# Altium PCB usb_to_i2c.PcbDoc
Units mm, origin at the board's own origin, x right, y up, seen from the top; angles counter-clockwise.
Board outline 38.77 x 21.02 mm, 2 copper layers (Top Layer, Bottom Layer), stack 0.325 mm thick; 16 components, 11 nets, 69 pads, 17 vias.
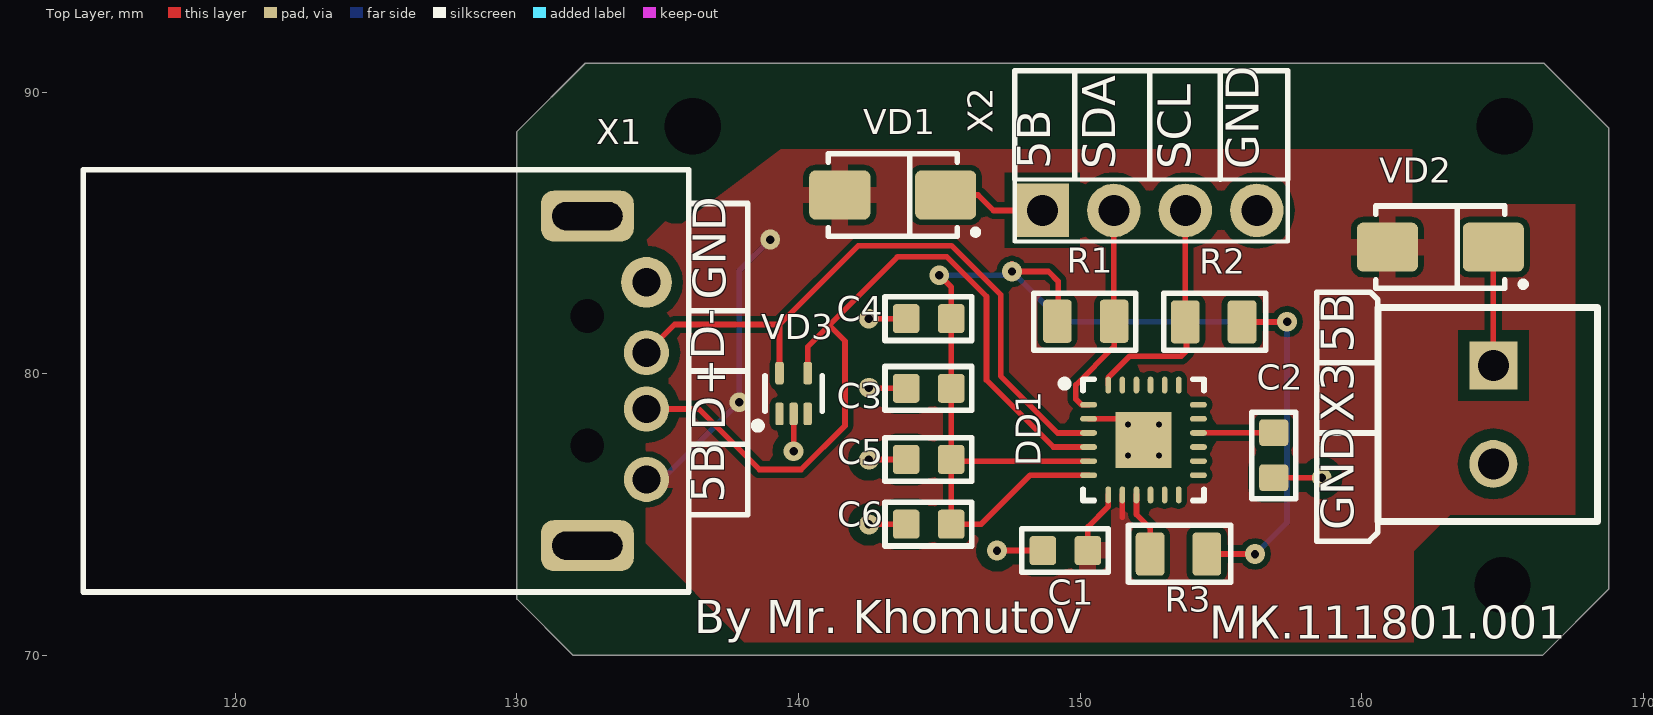
[diagram p0: Top Layer view]
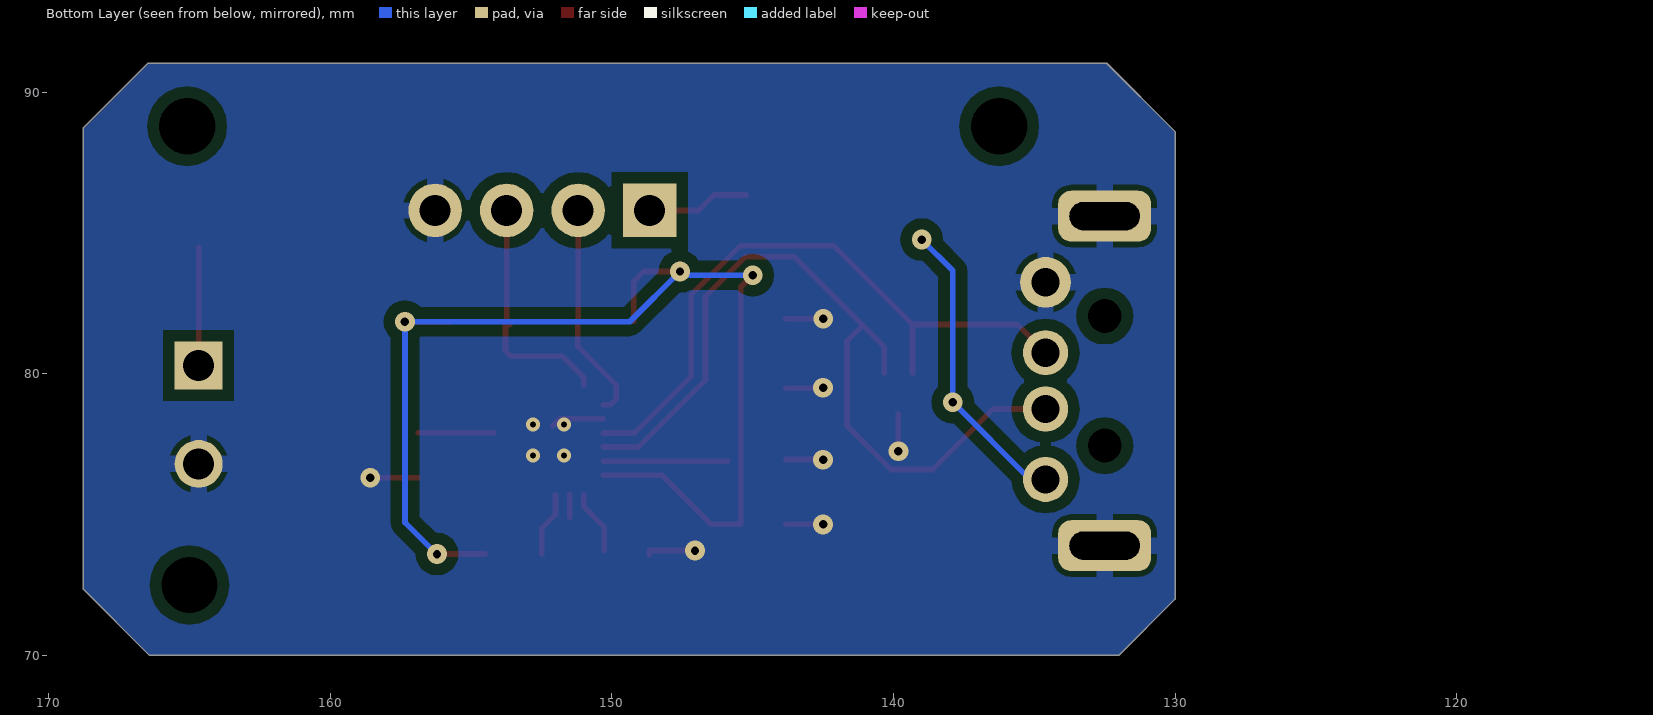
[diagram p1: Bottom Layer view, seen from below]

## Layer stack, top to bottom
Top Solder: solder mask 0.0102, Solder Resist, Dk 3.5
Top Layer: signal copper 0.0356
Dielectric 1: core 0.254, FR-4, Dk 4.2
Bottom Layer: signal copper 0.0356
Bottom Solder: solder mask 0.0102, Solder Resist, Dk 3.5

## Board outline
130,72 132,70 166.415,70 168.772,72.357 168.772,88.728 166.475,91.025 132.425,91.025 130,88.6

## Design rules (kind name [scope] priority, off if disabled: settings)
Clearance Clearance_power [InNet('+5В_USB') vs InNet('GND')] p1: gap=0.4 ignorepadtopadclearanceinfootprint=FALSE
Clearance Clearance_power_1 [InNet('X2_VCC') vs InNet('GND')] p2: gap=0.4 ignorepadtopadclearanceinfootprint=FALSE
Clearance Clearance_power_VDD [InNet('NetVD2_1') vs InNet('GND')] p3: gap=0.4 ignorepadtopadclearanceinfootprint=FALSE
Clearance Clearance_power3.3 [InNet('+3,3В') vs InNet('GND')] p4: gap=0.4 ignorepadtopadclearanceinfootprint=FALSE
Clearance [All] p5: gap=0.2 ignorepadtopadclearanceinfootprint=FALSE except(0.4: THPad-THPad THPad-Fill THPad-Poly THPad-Region; 0.6: Arc-THPad Track-THPad)
ComponentClearance [All] p1: gap=0.3 collisioncheckmode=3 verticalgap=0.01 showdistances=FALSE
MinimumSolderMaskSliver [All] p1: minsoldermaskwidth=0.05
PolygonConnect PolygonConnect_via [IsVia] p1: connectstyle=Direct reliefconductorwidth=0.254 reliefentries=4 polygonreliefangle="90 Angle" airgapwidth=0.254
PolygonConnect [All] p2: connectstyle=Relief reliefconductorwidth=0.6 reliefentries=4 polygonreliefangle="90 Angle" airgapwidth=0.2
RoutingVias [All] p1: holewidth=0.3 width=0.7 viastyle="Through Hole" minholewidth=0.3 minwidth=0.7 maxholewidth=0.3 maxwidth=0.7
SilkToSolderMaskClearance [IsPad] p1: minsilkscreentomaskgap=0 clearancetoexposedcopper=TRUE
SolderMaskExpansion [All] p1: expansion=0.102
Width [All] p1: maxlimit=3 minlimit=0.2 preferedwidth=0.2 minimp=50.000000 maximp=50.000000 favimp=50.000000
27 further rules are at their usual default settings.

## Components (designator, comment, footprint, x,y, rotation, side; value= is the part's Value field where it differs from the comment)
C1 "Capacitor" C0603 149.473,73.725 r0 top value=1мк
C2 "Capacitor" C0603 156.875,77.11 r90 top value=1мк
C3 "Capacitor" C0603 144.622,79.484 r0 top value=1мк
C4 "Capacitor" C0603 144.622,81.959 r0 top value=0,1мк
C5 "Capacitor" C0603 144.622,76.959 r0 top value=1мк
C6 "Capacitor" C0603 144.622,74.659 r0 top value=0,1мк
DD1 "CP2112-F02-GM" QFN24 152.25,77.65 r0 top
R1 "Resistor_0,125Вт" R0805 150.2,81.866 r180 top value=10к
R2 "Resistor_0,125Вт" R0805 154.743,81.841 r0 top value=10к
R3 "Resistor_0,125Вт" R0805 153.492,73.6 r0 top value=10к
VD1 "DiodeSchottky" SMA 143.345,86.35 r180 top
VD2 "DiodeSchottky" SMA 162.792,84.5 r180 top
VD3 "SP3003-02XTG" SOT553 139.825,79.3 r90 top
X1 "USB connector" "USB 2.0 A PLUG" 134.601,79.75 r90 top
X2 "Header_4_sct" PLS-4HOLES 156.275,85.8 r90 top
X3 "Выход питания" "TERMINAL 2 way-3.5mm" 164.272,78.55 r270 top

## Footprints (in the part's own frame and the unit in brackets; to place one, negate y for a bottom-side part, rotate by r counter-clockwise, add the part's x,y. Pads: shape width x height; smd on the part's side, far side on the other; paste and mask are expansions set on the pad)
C0603 [mm]
  rrect25% 0.94x1.03 smd: 1(-0.8,0) 2(0.8,0)
  silkscreen extent -1.55,-0.77 1.53,0.77, body extent -0.8,-0.4 0.8,0.4, height 0.9
PLS-4HOLES [mm]
  rect 1.9x1.9 hole 1.1: 1(0,7.62)
  round 1.9 hole 1.1: 2(0,5.08) 3(0,2.54)
  round 1.9 hole 1.1 mask+0.102: 4(0,0)
  silkscreen extent -1.1,-1.1 1.1,8.6
QFN24 [mm]
  oval 0.6x0.2 smd: 1(-1.95,1.25) 2(-1.95,0.75) 3(-1.95,0.25) 4(-1.95,-0.25) 5(-1.95,-0.75) 6(-1.95,-1.25) 13(1.95,-1.25) 14(1.95,-0.75) 15(1.95,-0.25) 16(1.95,0.25) 17(1.95,0.75) 18(1.95,1.25)
  oval 0.2x0.6 smd: 7(-1.25,-1.95) 8(-0.75,-1.95) 9(-0.25,-1.95) 10(0.25,-1.95) 11(0.75,-1.95) 12(1.25,-1.95) 19(1.25,1.95) 20(0.75,1.95) 21(0.25,1.95) 22(-0.25,1.95) 23(-0.75,1.95) 24(-1.25,1.95)
  rect 2x2 smd: 25(0,0)
  silkscreen extent -2.92,-2.15 2.15,2.15, body extent -2,-2 2,2, height 0.8
R0805 [mm] "Chip Resistor, 2-Leads, Body 2,10x1,30mm, IPC Medium Density"
  rrect25% 1.02x1.53 smd paste-5: 1(-1.008,0) 2(1.008,0)
  silkscreen extent -1.78,-1 1.85,1.02, body extent -1.1,-0.7 1.1,0.7, height 0.55
SMA [mm]
  rrect25% 2.17x1.74 smd: 1(-1.88,0) 2(1.88,0)
  silkscreen extent -3.04,-1.46 2.29,1.46, body extent -2.5,-1.35 2.5,1.35, height 2.15
SOT553 [mm]
  rrect50% 0.8x0.3 smd: 1(-0.725,0.5) 2(-0.725,0) 3(-0.725,-0.5)
  rrect50% 0.8x0.305 smd: 4(0.725,-0.5) 5(0.725,0.5)
  silkscreen extent -1.27,-1.02 0.64,1.39, body extent -0.65,-0.85 0.65,0.85, height 0.6
"TERMINAL 2 way-3.5mm" [mm]
  rect 1.7x1.7 hole 1.1: 1(-1.75,0.4)
  round 1.7 hole 1.1: 2(1.75,0.4)
  silkscreen extent -3.8,-3.7 3.8,4.1, body extent -3.56,-3.44 3.56,3.85, height 8.51
"USB 2.0 A PLUG" [mm]
  round 1.6 hole 1: 1(-3.5,0) 2(-1,0) 3(1,0)
  rrect50% 1.8x3.3 hole 1 slot 2.5 at 90 deg: 4(-5.85,2.1) 4(5.85,2.1)
  round 1.8 hole 1: 4(3.5,0)
  round 0 hole 1.2 unplated: ""(-2.3,2.1) ""(2.3,2.1)
  silkscreen extent -7.5,-1.5 7.5,20, body extent -6.3,0 6.3,20, height 4.15

## Part data
C1 C2 C3 C5: library part cap134, "Конденсатор", Part Name=Capacitors, Part Number=GRM188R71C105KA12D**, Voltage=50B, id=cap134, TKE=X7R
C4 C6: library part cap131, "Конденсатор", Part Name=Capacitors, Part Number=GRM188R71H104K, Voltage=50B, id=cap131, TKE=X7R
DD1: library part interf14, "USB-I2C преобразователь", Current Consumption=15mA, Manufacture="Silicon Laboratories", Part Name="HID USB to SMBUS Bridge", Power Supply=3.0-3.6V, id=interf14, Part Number=CP2112-F02-GM, Type Supply="Single Polar", Vref output=3.45V
R1 R2 R3: library part res97, "Резистор", Manufacture=Yageo, Part Name=Resistor, Part Number=RC0805FR-0710KL, Power=0,125Вт, Accuracy=1%, id=res97
VD1 VD2: library part diode2, "Диод Шоттки", Forward Current=3A, Forward Voltage=0,55B, Manufacture="Taiwan Semiconductor", Part Name="Diode Schottky", Part Number=SK34A, Reverse Voltage=40B, id=diode2
VD3: library part diode14, "Двухканальная ESD защита USB", Breakdown Voltage=6В, Capacitance=0,65pF, Leakage current=0,5uA, Manufacture=Littelfuse, Part Name="ESD Suppression Diodes for USB", id=diode14, Number of Channels=2, Part Number=SP3003-02XTG, Reverse Voltage=6В
X1: library part connect36, "Разъем - 4 конт. вилка", Manufacture=CUI, Part Name="USB 2.0 type A plug 4 pin Horizontal TH", Part Number=UP2-AH-1-TH, Contact_1=VBUS, Contact_2=D-, Contact_3=D+, Contact_4=GND, id=connect36
X2: library part connect10, "Разъем - 4 конт. розетка", Part Name="I2C устройства", Contact_1=5В, Contact_2=SDA, Contact_3=SCL, Contact_4=GND, id=connect10
X3: library part connect34, "Разъем - 2 конт. клеммник", Part Name="TERMINAL BLOCK 2 way", Contact_1=5В, Contact_2=GND, Etch=3.5mm, id=connect34

## Free pads (board coordinates)
  round 0 hole 2 unplated: 2(165.082,88.79) 3(165,72.5) 4(136.25,88.79)

## Via types
v1: diameter 0.7, hole 0.3, Top Layer to Bottom Layer, tented both sides, 13 vias
v2: diameter 0.5, hole 0.2, Top Layer to Bottom Layer, 4 vias

## Nets (pads, with @x,y where several pads share a name; then routed paths per layer and width w, separated by ;. In a path a pad name is that pad's centre, name@x,y a point inside that pad or via, vN(x,y) a via of type N, cw(c..) or ccw(c..) an arc to the next point about the centre after c; other vN are vias at no path point)
+3,3В: C3.2 C4.2 C5.2 C6.2 DD1.5 DD1.6 R1.2 R2.2 R3.2 | length 47.7
  Top Layer w0.2: v1(145,83.5) 145.422,83.078 C4.2 C3.2 C5.2 C6.2@145.422,74.704 ; C6.2 146.484,74.659 148.225,76.4 DD1.6 ; C5.2@145.885,76.9 147.05,76.9 DD1.5 ; v1@147.581,83.9 v1(147.581,83.632) 148.873,83.632 149.219,83.287 R1.2@149.219,81.866 ; R3.2 v1(156.21,73.6) ; R2.2 157.268,81.841 v1@157.347,81.762
  Bottom Layer w0.2: v1(145,83.5) 147.452,83.5 147.45,83.502 v1(147.581,83.632) 149.363,81.85 v1(157.347,81.85) 157.347,74.722 v1@156.225,73.6
+5В_USB: C1.2 DD1.7 DD1.8 VD1.2 VD2.2 X1.1 | length 13.7
  Top Layer w0.2: C1.2 150.273,74.562 151,75.289 DD1.7 ; 151.5,74.9 DD1.8
  Bottom Layer w0.2: X1.1 135.155,76.25 v1(137.894,78.989) 137.894,83.66 v1(139,84.766)
DD1_1_SDA: DD1.1 R1.1 X2.2 | length 7.8
  Top Layer w0.2: DD1.1 150.047,78.9 149.85,79.097 149.85,79.608 151.208,80.965 R1.1 ; R1.1@151.234,81.866 151.195,81.905 151.195,85.762 X2.2@151.234,85.8
DD1_3_D+: DD1.3 VD3.5 X1.3 | length 23.4
  Top Layer w0.2: X1.3 135.601,81.75 139.325,81.75 ; VD3.5 139.325,81.75 ; DD1.3 149.2,77.9 147.176,79.924 147.176,82.809 145.435,84.55 142.125,84.55 139.325,81.75
DD1_4_D-: DD1.4 VD3.4 X1.2 | length 29.1
  Top Layer w0.2: X1.2 136.462,78.75 138.612,76.6 140.094,76.6 141.65,78.156 141.65,81.162 141.113,81.698 ; VD3.4 140.325,80.958 143.517,84.15 145.269,84.15 146.675,82.744 146.675,79.773 149.048,77.4 DD1.4
DD1_9_R\S\T\: DD1.9 R3.1 | length 2.3
  Top Layer w0.2: DD1.9 152,75.006 152.485,74.521 R3.1
DD1_16_VPP: C2.2 DD1.16 | length 2.7
  Top Layer w0.2: DD1.16 C2.2
DD1_24_SCL: DD1.24 R2.1 X2.3 | length 8.6
  Top Layer w0.2: DD1.24 151,79.866 151.759,80.625 153.585,80.625 153.775,80.815 R2.1@153.775,81.85 ; R2.1@153.635,81.741 R2.1 X2.3
GND: C1.1 C2.1 C3.1 C4.1 C5.1 C6.1 DD1.2 DD1.25 VD3.2 X1.4 X2.4 X3.2 | length 12
  Top Layer w0.2: v1(139.825,77.25) VD3.2 ; v1(142.496,81.959) C4.1 ; v1(142.5,74.65) 142.509,74.659 C6.1 ; v1(142.5,76.952) 142.506,76.959 C5.1 ; v1(142.5,79.506) 142.522,79.484 C3.1 ; v1(147.049,73.725) C1.1 C1.1@148.673,73.585 ; DD1.2 151.856,78.4 DD1.25@152.1,78.156 ; C2.1 v1(158.575,76.31)
  other v2: 151.7,77.1 152.8,77.1 151.7,78.2 152.8,78.2
X2_VCC: VD1.1 X2.1 | length 3.7
  Top Layer w0.2: VD1.1 146.372,86.35 146.922,85.8 X2.1
X3_5В: VD2.1 X3.1 | length 4.2
  Top Layer w0.2: X3.1 VD2.1
pads on no net: DD1.10 DD1.11 DD1.12 DD1.13 DD1.14 DD1.15 DD1.17 DD1.18 DD1.19 DD1.20 DD1.21 DD1.22 DD1.23 VD3.1 VD3.3 X1.

## Polygon pours and split planes (outlines as drawn)
GND on Bottom Layer "GND" (solid, pour order 14): 132,70 130,72 130,88.575 132.45,91.025 166.425,91.025 168.722,88.728 168.772,88.728 168.772,72.357 166.415,70
+5В_USB on Top Layer "+5,5В" (solid, remove dead copper, pour order 10): 134.575,73.975 138.081,70.469 165.55,70.469 167.575,72.494 167.575,87.969 137.825,87.969 134.575,84.719

## Other copper
Top Layer:
  pour cut-out: 149.25,74.275 151.1,74.275 151.1,76.204 148.321,76.204 146.378,74.261 149.264,74.261 149.275,74.272
  pour cut-out: 161.8,86.025 168.6,86.025 168.772,86.197 168.772,88.728 166.4,91.1 161.78,91.1 161.78,90.695 161.8,90.675
  pour cut-out: 134.611,88.075 135.457,87.229 135.457,85.325 135.85,85.325 139.506,88.075 136.885,90.39 136.885,90.695 134.895,90.695 134.575,90.375
  pour cut-out: 161.85,70.25 161.85,72.2 161.85,73.7 163.15,75 168.123,75 168.123,72.098 166.275,70.25

## Silkscreen, mask and mechanical layers (free items; w line width, h text height)
Top Overlay:
  lines w0.2: 136.101,75 138.2,75 138.2,86.045 136.101,86.045 ; 136.101,77.5 138.2,77.5 ; 136.101,80.1 138.2,80.1 ; 136.105,82.241 138.204,82.241 ; 147.675,86.907 147.675,90.767 157.375,90.767 157.375,86.907 ; 149.805,86.927 149.805,90.667 ; 152.477,86.922 152.477,90.667 ; 154.977,86.914 154.977,90.667 ; 158.4,77.9 160.572,77.9 ; 158.4,80.388 160.572,80.388 ; 160.572,74.75 160.572,74.372 160.261,74.061 158.4,74.061 158.4,82.9 160.3,82.9 160.572,82.628 160.572,82.35
  text "5В" at 149.327,87.267 h2 r90
  text "SDA" at 151.633,87.267 h2 r90
  text "SCL" at 154.315,87.267 h2 r90
  text "GND" at 156.735,87.267 h2 r90
  text "GND" at 137.8,82.628 h2 r90
  text "5В" at 160.1,80.75 h2 r90
  text "D-" at 137.75,80.5 h2 r90
  text "D+" at 137.788,77.97 h2 r90
  text "5В" at 137.75,75.416 h2 r90
  text "GND" at 160.1,74.44 h2 r90
  text "By Mr. Khomutov" at 136.3,70.4 h2
  text "МК.111801.001" at 154.583,70.2 h2
Mechanical 1:
  lines w0.2: 130,72 132,70 166.25,70 166.415,70 168.772,72.357 168.772,88.728 166.475,91.025 132.425,91.025 130,88.6 130,72